# Altium PCB Project2PCB.PcbDoc
Units mm, origin at the board's own origin, x right, y up, seen from the top; angles counter-clockwise.
Board outline 99.44 x 94.87 mm, 2 copper layers (Top Layer, Bottom Layer); 60 components, 61 nets, 240 pads, 2 vias.
Unrouted connection lines stored in the file: 1.
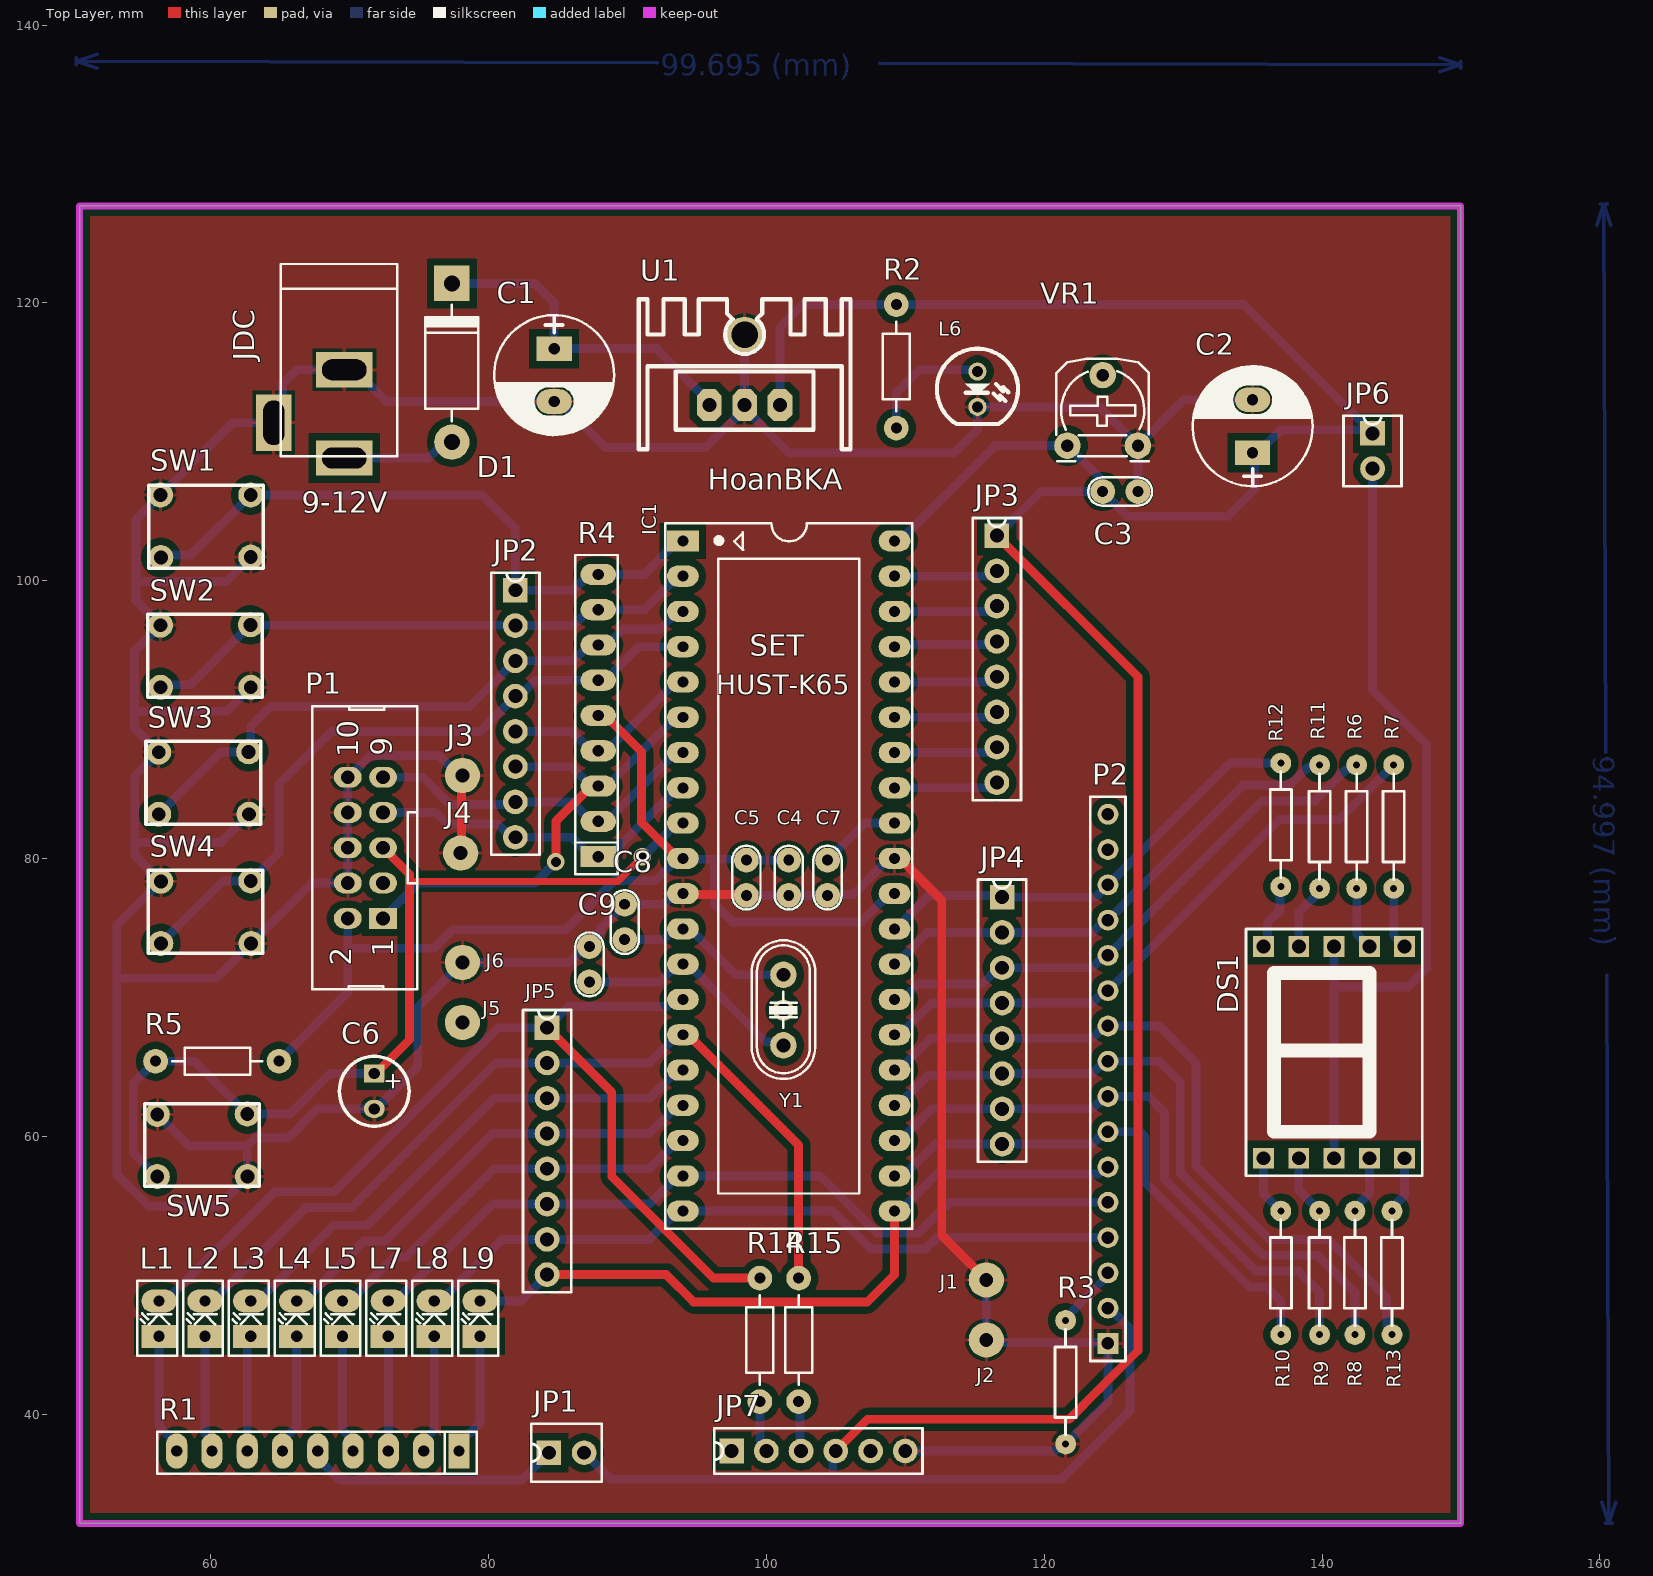
[diagram p0: Top Layer view]
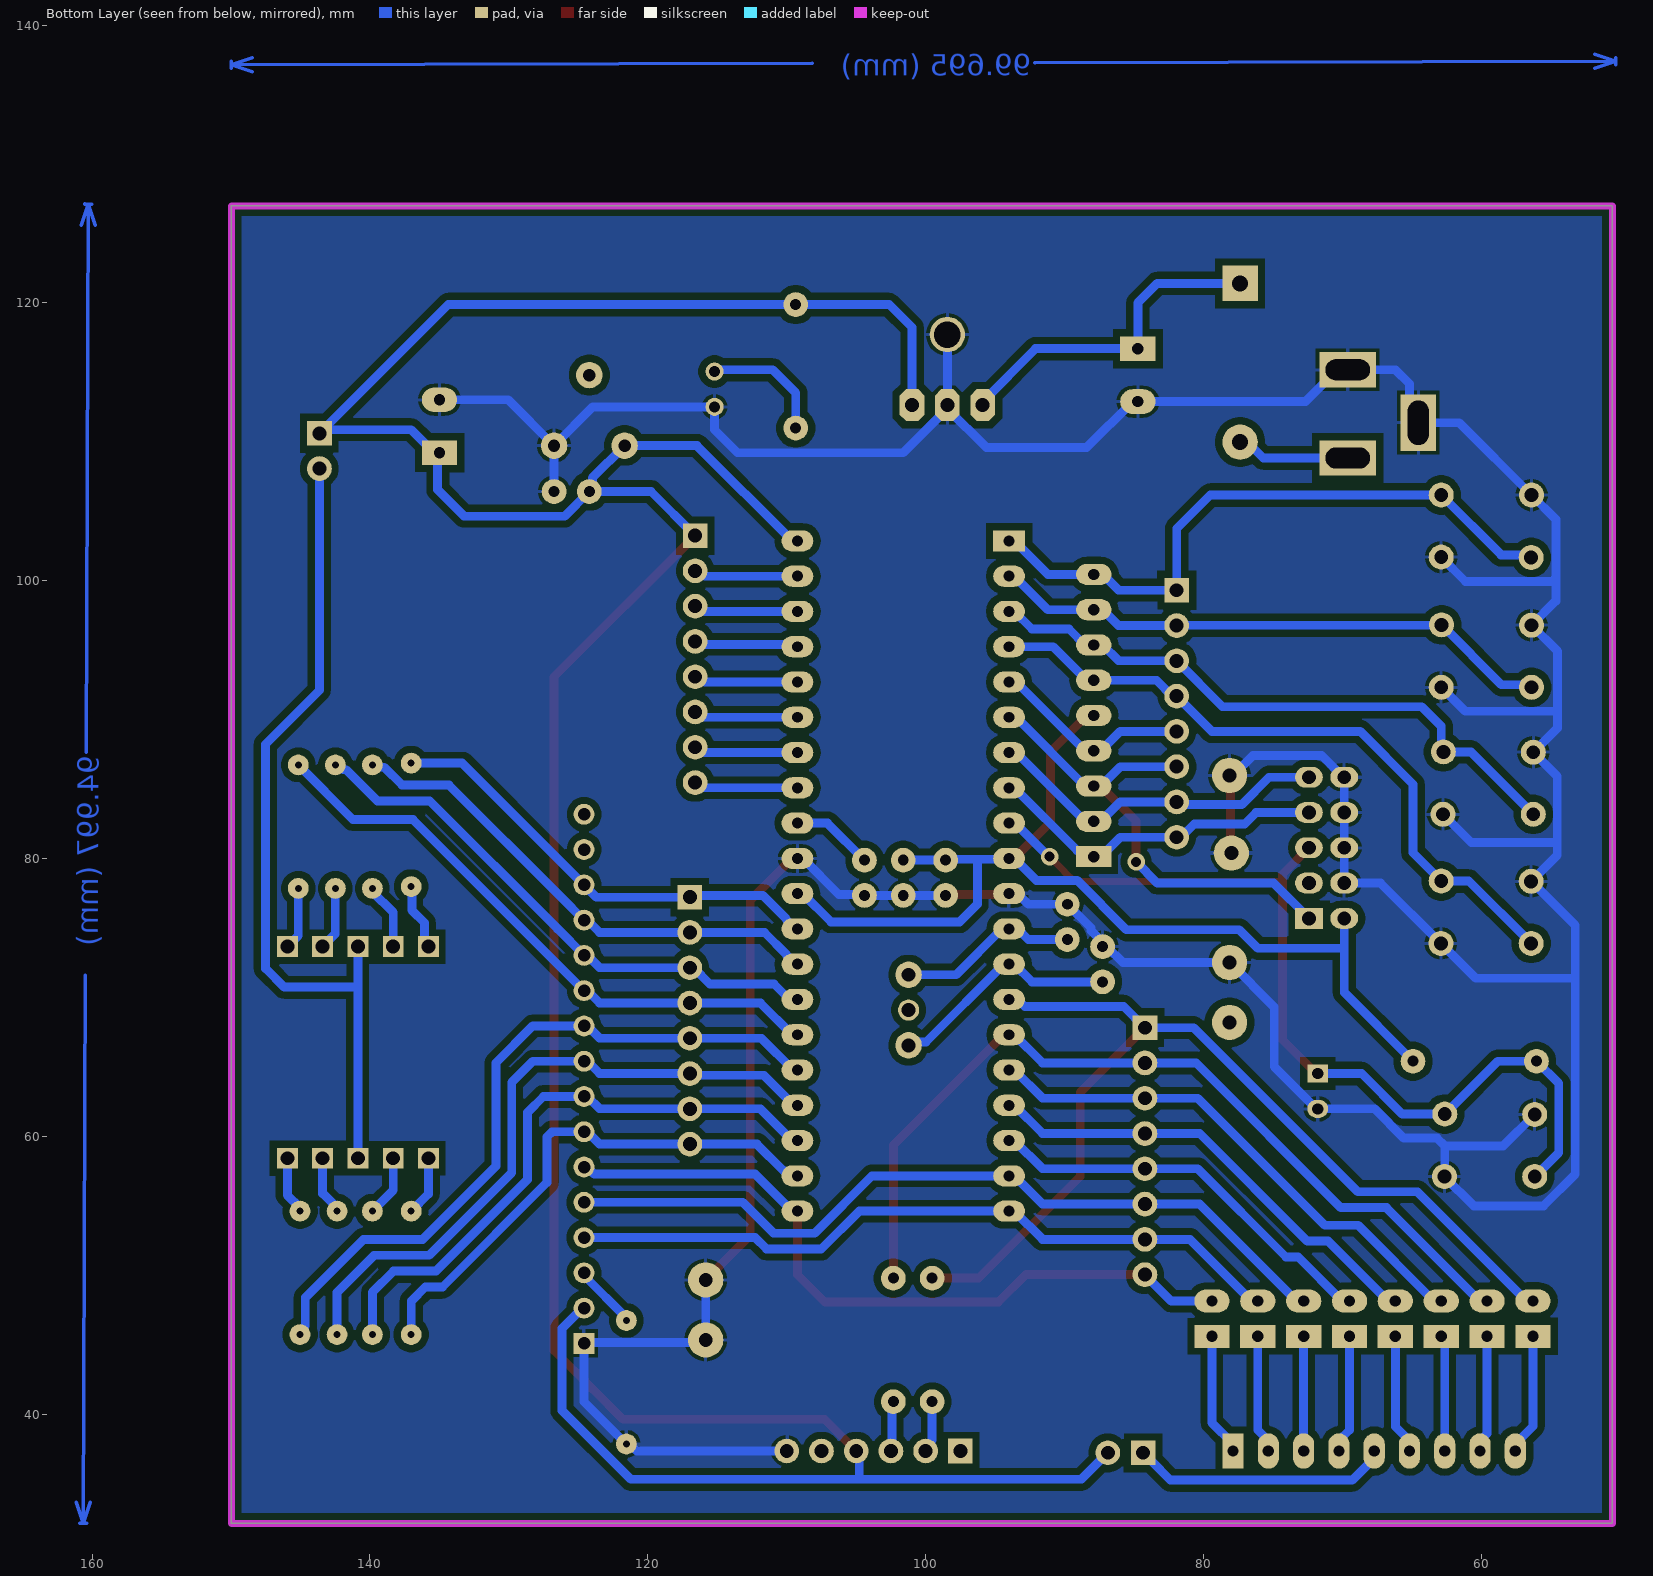
[diagram p1: Bottom Layer view, seen from below]
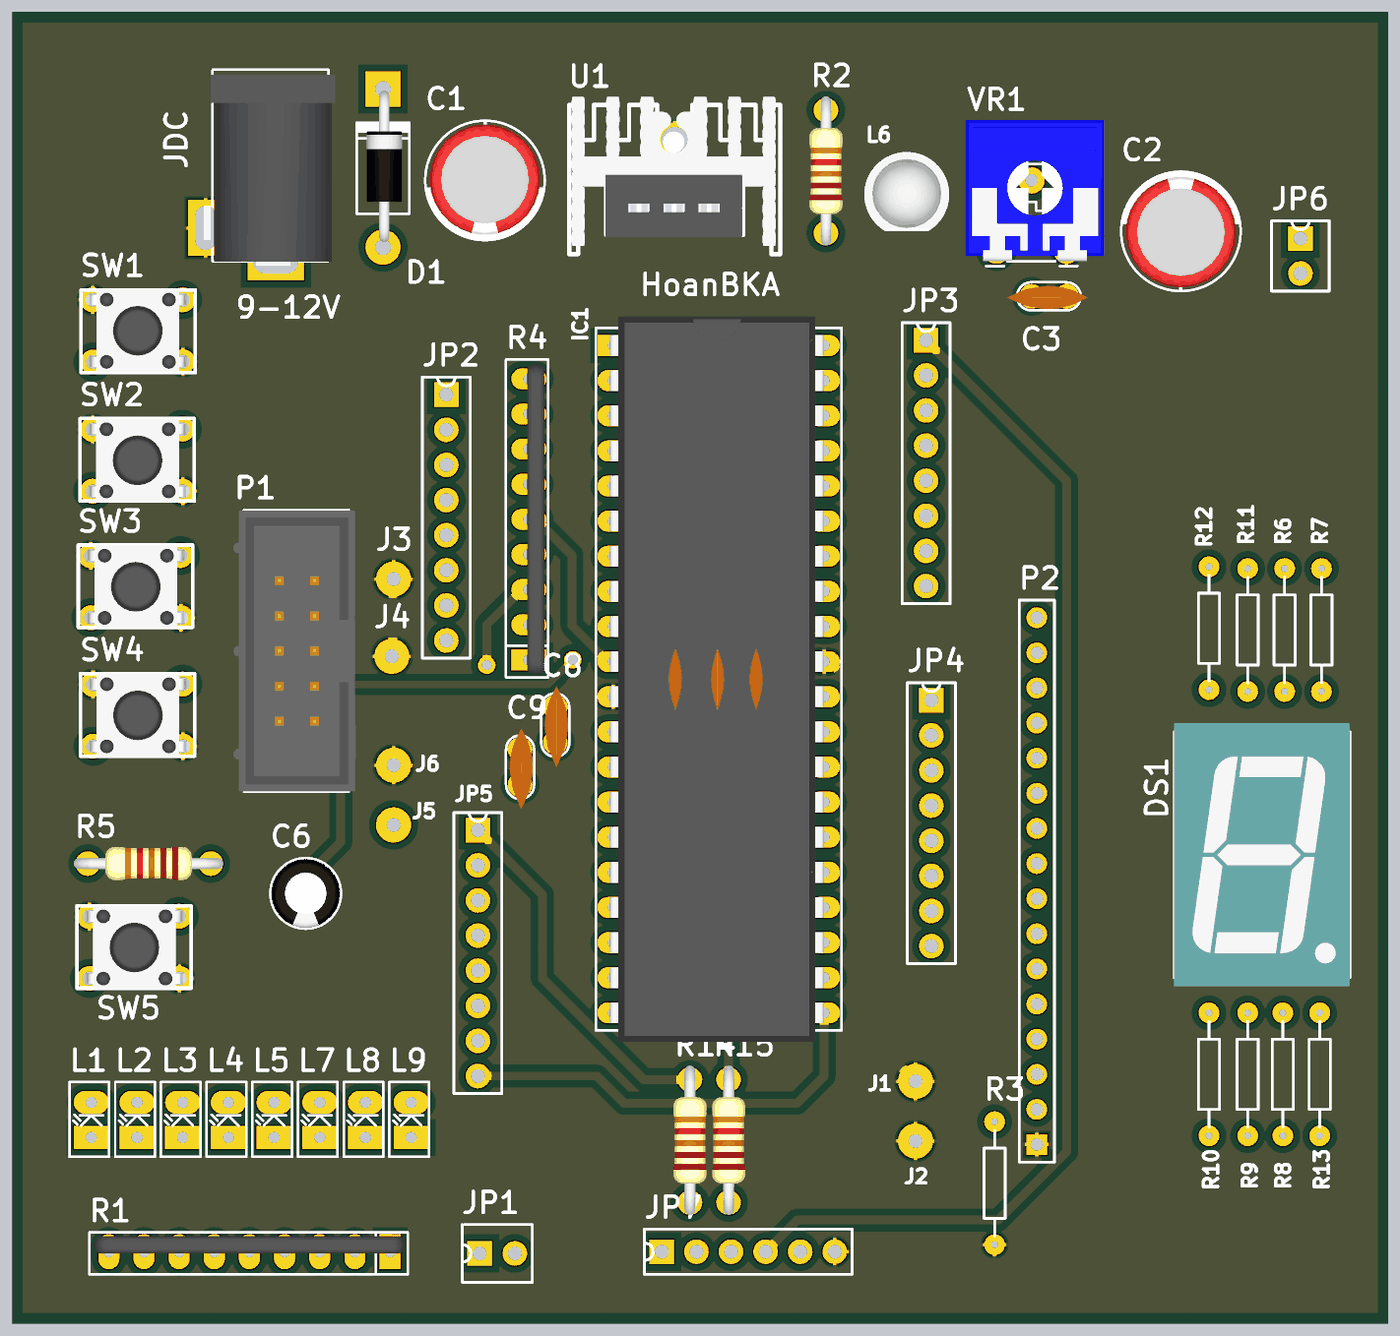
[diagram p2: 3D render of the assembled board from above, using the file's embedded part models]

## Layer stack, top to bottom
Top Solder: solder mask 0.0102, Solder Resist, Dk 3.5
Top Layer: signal copper 0.0356
Dielectric 1: dielectric 0.32, FR-4, Dk 4.8
Bottom Layer: signal copper 0.0356
Bottom Solder: solder mask 0.0102, Solder Resist, Dk 3.5

## Board outline
50.546,32.131 149.987,32.131 149.987,127 50.546,127

## Design rules (kind name [scope] priority, off if disabled: settings)
Clearance [All] p1: gap=0.508 ignorepadtopadclearanceinfootprint=FALSE
PolygonConnect [All] p1: connectstyle=Relief reliefconductorwidth=0.254 reliefentries=4 polygonreliefangle="90 Angle" airgapwidth=0.254
RoutingVias [All] p1: holewidth=0.711 width=1.27 viastyle="Through Hole" minholewidth=0.711 minwidth=1.27 maxholewidth=0.711 maxwidth=1.27
SolderMaskExpansion [All] p1: expansion=0.102 istentingtop=FALSE
Width [All] p1: maxlimit=1.397 minlimit=0.381 preferedwidth=0.381
30 further rules are at their usual default settings.

## Classes and differential pairs
component class Project2SCH: C1 C2 C3 C4 C5 C6 C7 C8 C9 D1 DS1 IC1 J1 J2 J3 J4 J5 J6 JDC JP3 JP6 JP7 L1 L2 L3 L4 L5 L6 L7 L8 L9 P1 P2 R1 R2 R3 R4 R5 R6 R7 R8 R9 R10 R11 R12 R13 R14 R15 SW1 SW2 SW3 SW4 SW5 U1 VR1 Y1

## Components (designator, comment, footprint, x,y, rotation, side; value= is the part's Value field where it differs from the comment)
C1 "1000uF/16V" CP1.5/3.4 84.709,116.713 r270 top
C2 "1000uF/16V" CP1.5/3.4 135.001,109.22 r90 top
C3 "100pF" CN1 126.746,106.426 r180 top
C4 "100nF" CN1 101.6,77.343 r90 top value=100pF
C5 "100nF" CN1 98.552,77.343 r90 top value=100pF
C6 "10uF" C5mm 71.755,63.246 r270 top
C7 "100nF" CN1 104.394,77.343 r90 top value=100pF
C8 "22pF" CN1 89.789,76.708 r270 top value=100pF
C9 "22pF" CN1 87.249,73.66 r270 top value=100pF
D1 "1N4007" D2A 77.343,121.412 r270 top
DS1 "7SEG-A" LED7SEG 140.843,66.04 r0 top
IC1 "ATMEL 16L" DIP40/W0.6 93.98,102.87 r270 top value="Atmega 16L"
J1 "Hole" JP1 115.824,49.657 r90 top
J2 "Hole" JP1 115.824,45.339 r90 top
J3 "Hole" JP1 78.105,85.979 r90 top
J4 "Hole" JP1 77.978,80.391 r90 top
J5 "Hunget" JP1 78.105,68.199 r270 top
J6 "Heatsink Hole" JP1 78.105,72.517 r270 top
JDC "Jac DC" DC-IN 67.056,112.014 r270 top (schematic designator JDC1)
JP1 "JP2" CON2 84.328,37.211 r90 top value="Connector 2"
JP2 "JP8" CON8 81.915,99.314 r0 top value="Connector 8"
JP3 "JP8" CON8 116.586,103.251 r0 top value="Connector 8"
JP4 "JP8" CON8 116.967,77.216 r0 top value="Connector 8"
JP5 "JP8" CON8 84.201,67.818 r0 top value="Connector 8"
JP6 "JP2" CON2 143.637,110.617 r0 top value="Connector 2"
JP7 "JP6" CON6 97.489,37.338 r90 top value="Connector 6"
L1 "LED" LED-V 56.261,45.593 r90 top value="LED 3 ly Single Colour" (schematic designator LED1)
L2 "LED" LED-V 59.563,45.593 r90 top value="LED 3 ly Single Colour" (schematic designator LED2)
L3 "LED" LED-V 62.865,45.593 r90 top value="LED 3 ly Single Colour" (schematic designator LED3)
L4 "LED" LED-V 66.167,45.593 r90 top value="LED 3 ly Single Colour" (schematic designator LED4)
L5 "LED" LED-V 69.469,45.593 r90 top value="LED 3 ly Single Colour" (schematic designator LED5)
L6 "LED_G_5" LED5G 115.189,115.062 r270 top value=Green (schematic designator LED6)
L7 "LED" LED-V 72.771,45.593 r90 top value="LED 3 ly Single Colour" (schematic designator LED7)
L8 "LED" LED-V 76.073,45.593 r90 top value="LED 3 ly Single Colour" (schematic designator LED8)
L9 "LED" LED-V 79.375,45.593 r90 top value="LED 3 ly Single Colour" (schematic designator LED9)
P1 "SPI" IDE_2X5 72.39,75.692 r90 top value="Header 5x2"
P2 "Header 16" HDR1X16 124.587,45.085 r90 top
R1 "1K" RN8 77.851,37.338 r180 top value=10K
R2 "1k" R1/4W 109.347,119.888 r270 top value="R1/4W - 1K"
R3 "1k" R1/6W 121.539,42.291 r90 top value="R1/4W - 1K"
R4 "10K" RN8 87.884,80.137 r90 top
R5 "10k" R1/4W 56.007,65.405 r0 top value="R1/4W - 1K"
R6 "1k" R1/6W 142.494,82.296 r270 top value="R1/4W - 1K"
R7 "1k" R1/6W 145.161,82.296 r270 top value="R1/4W - 1K"
R8 "1k" R1/6W 142.367,50.165 r90 top value="R1/4W - 1K"
R9 "1k" R1/6W 139.827,50.165 r90 top value="R1/4W - 1K"
R10 "1k" R1/6W 137.033,50.165 r90 top value="R1/4W - 1K"
R11 "1k" R1/6W 139.827,82.296 r270 top value="R1/4W - 1K"
R12 "1k" R1/6W 137.033,82.423 r270 top value="R1/4W - 1K"
R13 "1k" R1/6W 145.034,50.165 r90 top value="R1/4W - 1K"
R14 "100R" R1/4W 99.521,49.784 r270 top value="R1/4W - 1K"
R15 "100R" R1/4W 102.315,49.784 r270 top value="R1/4W - 1K"
SW1 "SW" SW-4P-S 62.865,101.702 r180 top value="Button chip 4 pin"
SW2 "SW" SW-4P-S 56.363,96.799 r0 top value="Button chip 4 pin"
SW3 "SW" SW-4P-S 56.236,87.655 r0 top value="Button chip 4 pin"
SW4 "SW" SW-4P-S 56.388,78.359 r0 top value="Button chip 4 pin"
SW5 "SW" SW-4P-S 56.134,61.57 r0 top value="Button chip 4 pin"
U1 "LM7805" QTO-220H3 95.885,112.649 r0 top
VR1 "10K" VR 121.666,109.728 r0 top value="VR 10K"
Y1 "8MHz" XT2 101.219,69.088 r270 top

## Footprints (in the part's own frame and the unit in brackets; to place one, negate y for a bottom-side part, rotate by r counter-clockwise, add the part's x,y. Pads: shape width x height; smd on the part's side, far side on the other; paste and mask are expansions set on the pad)
C5mm [mm]
  rect 1.3x1.5 hole 0.8: 1(-1.27,0)
  oval 1.3x1.5 hole 0.8: 2(1.27,0)
  silkscreen extent -2.51,-2.51 2.51,2.51, body extent -2.5,-2.5 2.49,2.5, height 11.01
CN1 [mil]
  round 70 hole 31: 1(0,0) 2(100,0)
  silkscreen extent -40,-40 141,40, body extent -60,-30 170,37, height 265
CON2 [mil]
  rect 70x70 hole 39.37 unplated: 1(0,0)
  round 70 hole 39.37 unplated: 2(0,-100)
  silkscreen extent -82,-150 82,50
CON6 [mil]
  rect 70x70 hole 39.37 unplated: 1(0,0)
  round 70 hole 39.37 unplated: 2(0,-98.43) 3(0,-196.85) 4(0,-295.28) 5(0,-393.7) 6(0,-492.13)
  silkscreen extent -64,-541 64,49
CON8 [mil]
  rect 70x70 hole 39.37 unplated: 1(0,0)
  round 70 hole 39.37 unplated: 2(0,-100) 3(0,-200) 4(0,-300) 5(0,-400) 6(0,-500) 7(0,-600) 8(0,-700)
  silkscreen extent -68,-750 68,50
CP1.5/3.4 [mil] "Tu hoa 220->470uF,16V, 470uF/16V,25V"
  rect 70x100 hole 32: 1(0,0)
  oval 70x100 hole 32: 2(150,0)
  silkscreen extent -95,-170 245,170, body extent -85,-157 230,157, height 446
D2A [mil] "Diode 2A, W 150mil, L 450mil"
  round 100 hole 45: 1(450,0)
  rect 100x100 hole 45: 2(0,0)
  silkscreen extent 61,-75 391,75, body extent 5,-47 435,54, height 100
DC-IN [mm] "Jac DC input"
  rect 2.54x4.064 hole 1.5 slot 3.2 at 90 deg: 1(3.175,2.54) 2(-3.175,2.54)
  rect 4.064x2.54 hole 1.5 slot 3.2 at 0 deg: 3(0.635,-2.54)
  silkscreen extent -10.8,-2.03 3.05,6.35, body extent -10.42,-2.67 3.4,6.84, height 11.02
DIP40/W0.6 [mil] "40 PIN, W 600mil, Pin to pin 100mil"
  rect 60x90 hole 31: 1(0,0)
  oval 60x90 hole 31: 2(100,0) 3(200,0) 4(300,0) 5(400,0) 6(500,0) 7(600,0) 8(700,0) 9(800,0) 10(900,0) 11(1000,0) 12(1100,0) 13(1200,0) 14(1300,0) 15(1400,0) 16(1500,0) 17(1600,0) 18(1700,0) 19(1800,0) 20(1900,0) 21(1900,600) 22(1800,600) 23(1700,600) 24(1600,600) 25(1500,600) 26(1400,600) 27(1300,600) 28(1200,600) 29(1100,600) 30(1000,600) 31(900,600) 32(800,600) 33(700,600) 34(600,600) 35(500,600) 36(400,600) 37(300,600) 38(200,600) 39(100,600) 40(0,600)
  silkscreen extent -50,-50 1950,650, body extent -82,-10 1982,600, height 224
HDR1X16 [mm] "Connector; Header; 16 Position"
  rect 1.5x1.5 hole 0.9: 1(0,0)
  round 1.5 hole 0.9: 2(2.54,0) 3(5.08,0) 4(7.62,0) 5(10.16,0) 6(12.7,0) 7(15.24,0) 8(17.78,0) 9(20.32,0) 10(22.86,0) 11(25.4,0) 12(27.94,0) 13(30.48,0) 14(33.02,0) 15(35.56,0) 16(38.1,0)
  silkscreen extent -1.27,-1.27 39.37,1.27, body extent -1.27,-1.27 39.37,1.27, height 7
IDE_2X5 [mm] "Header 10x2,20 pin, connecter"
  rect 1.5x2 hole 1: 1(0,0)
  oval 1.5x2 hole 1: 2(0,2.54) 3(2.54,0) 4(2.54,2.54) 5(5.08,0) 6(5.08,2.54) 7(7.62,0) 8(7.62,2.54) 9(10.16,0) 10(10.16,2.54)
  silkscreen extent -5.1,-2.47 15.29,5.11, body extent -5.07,-2.98 15.23,5.87, height 9.17
JP1 [mm]
  round 2.54 hole 1: 1(0,0)
LED5G [mm] "LED, GREEN, 2 LEAD, 5mm"
  round 1.3 hole 0.8: 1(0,0) 2(2.54,0)
  silkscreen extent -1.65,-2.92 3.77,2.92, body extent -1.71,-3.01 3.71,3.01, height 12.31
LED7SEG [mm] "LED7SEG"
  round 1.524 on Top Overlay: 0(4.724,-5.334)
  rect 1.5x1.5 hole 1: 1(-5.055,-7.62) 2(-2.515,-7.62) 3(0.025,-7.62) 4(2.565,-7.62) 5(5.105,-7.62) 6(5.105,7.62) 7(2.565,7.62) 8(0.025,7.62) 9(-2.515,7.62) 10(-5.055,7.62)
  silkscreen extent -6.32,-8.89 6.38,8.89, body extent -6.35,-9.52 6.35,9.53, height 8.03
LED-V [mil] "LED 2 PIN, Rectang Only colour"
  rect 65x100 hole 32: 1(0,0)
  oval 65x100 hole 32: 2(100,0)
  silkscreen extent -55,-51 158,62
QTO-220H3 [mil] "TO-220 1-2-3"
  oct 70x90 hole 40: 1(0,0) 2(100,0) 3(200,0)
  round 100 hole 75: 2(100,200)
  silkscreen extent -200,-125 400,300, body extent -194,-102 388,323, height 984
R1/4W [mil] "R 1/4W, 2 Pin, 350mil"
  round 70 hole 31: 1(0,0) 2(350,0)
  silkscreen extent 48,-38 302,38, body extent -40,-47 386,47, height 111
R1/6W [mm]
  round 1.5 hole 0.5: 1(-4.445,0) 2(4.445,0)
  silkscreen extent -3.81,-0.76 3.81,0.76
RN8 [mil] "R SIP8, 9 Pin"
  rect 60x100 hole 32: 1(0,0)
  oval 60x100 hole 32: 2(100,0) 3(200,0) 4(300,0) 5(400,0) 6(500,0) 7(600,0) 8(700,0) 9(800,0)
  silkscreen extent -50,-55 855,65, body extent -43,-44 843,5, height 259
SW-4P-S [mm]
  round 1.8 hole 1: 1(0,0) 2(0,-4.47) 3(6.502,-4.47) 4(6.477,0.025)
  silkscreen extent -0.91,-5.18 7.34,0.79, body extent -0.86,-5.23 7.35,0.76, height 9.52
VR [mil] "Resistor Variable"
  round 75 hole 35: 1(0,0) 2(100,200) 3(200,0)
  silkscreen extent -31,-44 231,246, body extent -87,-30 307,372, height 165
XT2 [mm] "Footpin for Crystal 2 pin"
  round 1.524 hole 1: 0(0,0)
  round 1.905 hole 1: 1(-2.54,0) 2(2.54,0)
  silkscreen extent -5.03,-2.29 4.96,2.29, body extent -5.93,-2.36 5.42,2.29, height 3.5

## Part data
C1 C2: library part CP4, "Cap 1000uF/16V - 220uF/50V", Description 1="2200uF-3300uF/6,3V - 1000uF-2200uF/10V", Description 2="1000uF/16V - 470uF => 1000uF/25V - 100uF/100V", Description 3=330uF>470uF/35V_220uF>470uF/50V_10uF>22uF/250V, Description 4="220uF => 330uF/63V - 10uF =>33uF/160 - 200V", Description 5="4,7uF>10uF/250V_3,3uF>10uF/400V - 2,2uF>4,7uF/450V"
C3 C4 C5 C7 C8 C9: library part CN1, "Cap np  1pF - 472pF"
C6: library part "Cap Pol 5mm", "Polarized Capacitor (Axial)", LatestRevisionDate=17-Jul-2002, LatestRevisionNote="Re-released for DXP Platform.", PackageReference=POLAR0.8, Published=8-Jun-2000, Publisher="Altium Limited"
D1: library part D1A, "Diode 1A"
DS1: library part LED7SEG-A, "14.2 mm General Purpose Blue 7-Segment Display: CA, RH DP, Gray Surface", Colour=Blue, PackageDocument=24-Sep-2002, ComponentLink1Description="Manufacturer Link", ComponentLink1URL=http://www.agilent.com/, DatasheetDocument=24-Sep-2002, LatestRevisionDate=17-Dec-2003, LatestRevisionNote="Schematic revised, PCB Footprint replaced.", MinimumIntensity="2020 ucd", Note="IF = 10 mA", PackageReference=H, Published=8-Jun-2000, Publisher="Altium Limited"
IC1: library part Atmega16L, "8-Bit AVR Microcontroller with 16K Bytes of In-System Programmable Flash Memory"
J1 J2 J3 J4 J5 J6: library part JP1, "JP1"
JDC: library part DCIN, "Jac DC input"
JP1 JP6: library part Con2, "Connector 2"
JP2 JP3 JP4 JP5: library part Con8, "Connector 8"
JP7: library part Con6, "Connector 6"
L1 L2 L3 L4 L5 L7 L8 L9: "LED Single colour Green and Red"
L6: library part LED_GREEN_5MM, "LED Green 5mm", ComponentLink1Description=Datasheet, ComponentLink1URL="D:\Dropbox\Datasheets\Opto and Illumination\LEDs\SMD LED.pdf", Unit Price=0.0476
P1: library part "IDE 5x2", "Header 5x2"
P2: "Header, 16-Pin", LatestRevisionDate=17-Jul-2002, LatestRevisionNote="Re-released for DXP Platform.", Publisher="Altium Limited"
R1 R4: library part RKC8LD, "Resistor Pack 4x2"
R2 R5 R14 R15: library part R1/4W, "Resistor 1/4W"
R3 R6 R7 R8 R9 R10 R11 R12 R13: library part Res, "Resistor 1/4W"
SW1 SW2 SW3 SW4 SW5: library part SW4, "Switch button 4 pin"
U1: "TO-220", Text Field1=70, Text Field2=30
VR1: library part VR1, "Var Resistor"
Y1: library part Crystal, "Crystal Oscillator", LatestRevisionDate=17-Jul-2002, LatestRevisionNote="Re-released for DXP Platform.", PackageReference=R38, Published=8-Jun-2000, Publisher="Altium Limited"

## Via types
v1: diameter 1.27, hole 0.711, Top Layer to Bottom Layer, 2 vias

## Nets (pads, with @x,y where several pads share a name; then routed paths per layer and width w, separated by ;. In a path a pad name is that pad's centre, name@x,y a point inside that pad or via, vN(x,y) a via of type N, cw(c..) or ccw(c..) an arc to the next point about the centre after c; other vN are vias at no path point)
AVR_RX: IC1.14 JP5.1 L1.2 R14.1 | length 73.1
  Top Layer w0.635: JP5.1 88.857,63.162 88.857,57.107 96.18,49.784 R14.1
  Bottom Layer w0.635: L1.2 56.706,48.133 64.579,56.007 68.876,56.007 80.687,67.818 JP5.1 85.725,69.342 92.85,69.342 93.358,69.85 IC1.14
AVR_TX: IC1.15 JP5.2 L2.2 R15.1 | length 63.6
  Top Layer w0.635: IC1.15 94.361,67.31 102.315,59.356 R15.1
  Bottom Layer w0.635: L2.2 60.086,48.133 66.817,54.864 70.104,54.864 80.518,65.278 JP5.2 91.567,65.278 93.599,67.31 IC1.15
GND: C1.2 C2.2 C3.1 C4.1 C5.1 C6.2 C7.1 C8.1 C9.1 IC1.11 IC1.31 J1.1 J2.1 J3.1 J4.1 J6.1 JDC.2 JDC.3 JP7.6 L6.2 P1.4 P1.6 P1.8 P1.10 P2.1 R3.1 SW1.1 SW1.3 SW2.1 SW2.3 SW3.1 SW3.3 SW4.1 SW4.3 SW5.1 SW5.3 U1.2 VR1.3 | length 371.9
  Top Layer w0.635: J4.1 78.041,80.454 78.041,85.915 J3.1 ; IC1.11 94.043,77.406 98.489,77.406 C5.1 ; IC1.31 109.601,80.01 112.615,76.996 112.615,52.866 J1.1
  Bottom Layer w0.635: SW5.1 58.395,59.309 62.611,59.309 ; SW3.3 60.706,81.153 54.51,81.153 ; SW2.3 61.14,90.604 54.684,90.604 54.483,90.805 ; SW1.1 61.114,99.951 54.862,99.951 54.61,100.203 ; J3.1 77.859,85.979 76.41,87.428 71.487,87.428 69.912,85.852 P1.10 P1.8 P1.6 P1.4 67.234,78.232 SW4.3 60.376,71.374 53.213,71.374 ; IC1.11 93.358,77.47 92.596,76.708 C8.1 88.075,74.993 88.075,74.795 87.249,73.969 C9.1 86.94,73.66 85.797,72.517 J6.1 74.888,69.3 74.888,65.009 71.855,61.976 67.661,61.976 65.555,59.87 63.172,59.87 62.611,59.309 ; U1.2@98.425,117.729 98.425,112.649 U1.2@98.425,112.395 ; C5.1 C4.1 C7.1 104.457,77.406 106.236,77.406 108.839,80.01 IC1.31 ; JP7.6 120.797,37.338 121.305,37.846 R3.1 124.587,40.894 P2.1 124.512,45.16 116.003,45.16 J2.1 J1.1 ; C3.1 VR1.3 ; C2.2 130.048,113.03 VR1.3 ; 53.213,71.374 53.213,75.184 SW4.1 54.51,80.237 54.51,81.153 ; 53.213,71.374 53.213,57.277 55.499,54.991 60.528,54.991 SW5.3 62.611,57.125 62.611,59.309 ; 54.483,90.805 54.483,94.92 SW2.1 54.61,98.552 54.61,100.203 ; 54.483,90.805 54.483,89.408 SW3.1 54.51,85.93 54.51,81.153 ; 54.61,100.203 54.61,104.419 SW1.3 61.57,111.379 JDC.3 65.151,112.014 65.151,114.173 66.167,115.189 JDC.2 70.358,115.189 72.644,112.903 C1.2 85.09,112.903 88.392,109.601 95.631,109.601 U1.2@98.425,112.395 ; U1.2@98.425,112.395 101.6,109.22 113.538,109.22 115.189,110.871 L6.2 123.952,112.522 VR1.3
MISO: IC1.7 JP2.7 P1.9 R4.2 | length 25.1
  Bottom Layer w0.635: P1.9 75.269,85.852 77.237,83.883 81.724,83.883 JP2.7 85.979,84.074 87.376,82.677 R4.2 88.519,82.677 93.472,87.63 IC1.7
MOSI: IC1.6 JP2.6 P1.1 R4.3 | length 35.8
  Top Layer w0.635: v1(84.836,79.756) 84.836,82.677 87.376,85.217 R4.3
  Bottom Layer w0.635: P1.1 74.93,78.232 83.312,78.232 v1(84.836,79.756) ; JP2.6 85.979,86.614 87.376,85.217 R4.3 88.519,85.217 93.472,90.17 IC1.6
NetC1_1: C1.1 D1.2 U1.1 | length 24.3
  Bottom Layer w0.635: D1.2 83.312,121.412 84.709,120.015 C1.1 92.075,116.713 95.885,112.903 U1.1
NetC7_2: C7.2 IC1.32 | length 5.9
  Bottom Layer w0.635: C7.2 107.061,82.55 IC1.32
NetC8_2: C8.2 IC1.12 Y1.1 | length 13.1
  Bottom Layer w0.635: C8.2 92.596,74.168 93.358,74.93 IC1.12 94.488,74.93 97.79,71.628 Y1.1
NetC9_2: C9.2 IC1.13 Y1.2 | length 16.9
  Bottom Layer w0.635: C9.2 92.329,71.12 93.599,72.39 IC1.13 94.361,72.39 99.96,66.791 100.976,66.791 Y1.2
NetD1_1: D1.1 JDC.1 | length 8.2
  Bottom Layer w0.635: JDC.1 75.685,108.839 76.828,109.982 D1.1
NetDS1_1: DS1.1 R10.2 | length 4.3
  Bottom Layer w0.635: DS1.1 135.788,55.855 R10.2
NetDS1_2: DS1.2 R9.2 | length 4.4
  Bottom Layer w0.635: DS1.2 138.328,56.109 R9.2
NetDS1_3: DS1.3 DS1.8 JP6.2 | length 60.1
  Bottom Layer w0.635: DS1.3 140.868,70.739 ; DS1.8 140.868,70.739 ; JP6.2 143.637,92.111 147.524,88.224 147.524,72.086 146.177,70.739 140.868,70.739
NetDS1_4: DS1.4 R8.2 | length 4.2
  Bottom Layer w0.635: R8.2 142.367,54.844 143.408,55.885 DS1.4
NetDS1_5: DS1.5 R13.2 | length 4.2
  Bottom Layer w0.635: R13.2 145.034,54.844 145.948,55.758 DS1.5
NetDS1_6: DS1.6 R7.2 | length 4.5
  Bottom Layer w0.635: R7.2 145.161,74.447 DS1.6
NetDS1_7: DS1.7 R6.2 | length 4.6
  Bottom Layer w0.635: R6.2 142.494,74.574 DS1.7
NetDS1_9: DS1.9 R11.2 | length 4.8
  Bottom Layer w0.635: DS1.9 138.328,76.118 139.827,77.617 R11.2
NetDS1_10: DS1.10 R12.2 | length 4.8
  Bottom Layer w0.635: DS1.10 136.071,73.943 136.071,75.363 136.984,76.275 136.984,77.929 R12.2
NetJP1_1: JP1.1 R1.5 | length 18.6
  Bottom Layer w0.635: R1.5 67.691,36.83 69.278,35.242 82.359,35.242 83.756,36.639 JP1.1
NetJP7_2: JP7.2 R14.2 | length 3.7
  Bottom Layer w0.635: R14.2 99.521,38.115 99.989,37.647 JP7.2
NetJP7_3: JP7.3 R15.2 | length 3.6
  Bottom Layer w0.635: R15.2 102.402,40.807 102.402,37.425 JP7.3
NetLED1_1: L1.1 R1.9 | length 8.8
  Bottom Layer w0.635: L1.1 56.261,39.116 57.531,37.846 R1.9
NetLED2_1: L2.1 R1.8 | length 8.5
  Bottom Layer w0.635: L2.1 59.563,38.595 60.071,38.087 R1.8
NetLED3_1: L3.1 R1.7 | length 8.4
  Bottom Layer w0.635: R1.7 62.611,45.339 L3.1
NetLED4_1: L4.1 R1.6 | length 8.7
  Bottom Layer w0.635: R1.6 65.151,38.087 66.167,39.103 L4.1
NetLED5_1: L5.1 R1.4 | length 8.6
  Bottom Layer w0.635: L5.1 69.469,38.849 70.231,38.087 R1.4
NetLED6_1: L6.1 R2.2 | length 9.1
  Bottom Layer w0.635: R2.2 109.347,113.538 110.998,115.189 115.062,115.189 L6.1
NetLED7_1: L7.1 R1.3 | length 8.3
  Bottom Layer w0.635: R1.3 L7.1
NetLED8_1: L8.1 R1.2 | length 8.6
  Bottom Layer w0.635: R1.2 75.311,38.087 76.073,38.849 L8.1
NetLED9_1: L9.1 R1.1 | length 8.9
  Bottom Layer w0.635: R1.1 77.851,37.846 79.375,39.37 L9.1
NetP2_3: P2.3 R3.2 | length 4.7
  Bottom Layer w0.635: R3.2 121.539,46.927 124.587,49.975 P2.3
PA0: C2.1 C3.2 C4.2 C5.2 IC1.10 IC1.30 IC1.40 JP1.2 JP3.1 JP6.1 JP7.4 P1.2 P2.2 R2.1 R4.5 R5.2 U1.3 VR1.1 | length 323.3
  Top Layer w0.635: R4.5 88.392,90.297 90.996,87.693 90.996,82.613 93.599,80.01 IC1.10 ; JP7.4 107.275,39.624 121.793,39.624 123.978,41.809 126.746,44.577 126.746,93.091 JP3.1
  Bottom Layer w0.635: R5.2 69.85,70.358 69.85,73.533 ; P1.2 69.85,73.533 ; JP1.2 88.773,35.306 104.775,35.306 ; U1.3 100.965,118.237 102.616,119.888 R2.1 134.366,119.888 JP6.1@143.383,110.871 ; C4.2 C5.2 98.489,79.947 96.266,79.947 ; JP7.4 104.775,37.124 104.775,35.306 ; IC1.30 108.839,77.47 106.807,75.438 97.536,75.438 96.266,76.708 96.266,79.947 ; IC1.40 109.601,102.87 116.459,109.728 VR1.1 123.987,107.407 123.987,106.645 C3.2 ; JP3.1 119.761,106.426 C3.2 ; P2.2 124.714,47.625 126.163,46.177 126.163,40.241 121.227,35.306 104.775,35.306 ; JP6.1 JP6.1@143.383,110.871 ; 69.85,73.533 76.073,73.533 77.416,74.876 85.533,74.876 89.079,78.422 92.011,78.422 93.599,80.01 IC1.10 94.043,79.947 96.266,79.947 ; C3.2 125.984,104.648 133.223,104.648 135.128,106.553 135.128,109.093 C2.1 135.382,109.22 137.033,110.871 JP6.1@143.383,110.871
PA1: IC1.39 JP3.2 | length 7.5
  Bottom Layer w0.635: IC1.39 115.896,100.33 116.277,100.711 JP3.2
PA2: IC1.38 JP3.3 | length 7.5
  Bottom Layer w0.635: IC1.38 115.896,97.79 116.277,98.171 JP3.3
PA3: IC1.37 JP3.4 | length 7.5
  Bottom Layer w0.635: IC1.37 109.39,95.42 116.375,95.42 JP3.4
PA4: IC1.36 JP3.5 | length 7.5
  Bottom Layer w0.635: IC1.36 115.896,92.71 116.277,93.091 JP3.5
PA5: IC1.35 JP3.6 | length 7.5
  Bottom Layer w0.635: IC1.35 115.896,90.17 116.277,90.551 JP3.6
PA6: IC1.34 JP3.7 | length 7.5
  Bottom Layer w0.635: IC1.34 115.896,87.63 116.277,88.011 JP3.7
PA7: IC1.33 JP3.8 | length 7.5
  Bottom Layer w0.635: IC1.33 115.896,85.09 116.277,85.471 JP3.8
PB0: IC1.1 JP2.1 R4.9 SW1.2 SW1.4 | length 46.4
  Bottom Layer w0.635: SW1.4 56.575,101.863 58.556,101.863 SW1.2 79.502,106.172 81.915,103.759 JP2.1 86.094,99.314 87.237,100.457 R4.9 91.186,100.457 93.599,102.87 IC1.1
PB1: IC1.2 JP2.2 R4.8 SW2.2 SW2.4 | length 41
  Bottom Layer w0.635: SW2.2 56.549,92.516 58.53,92.516 SW2.4 62.865,96.799 81.89,96.799 JP2.2 86.094,96.774 87.237,97.917 R4.8 91.186,97.917 93.599,100.33 IC1.2
PB2: IC1.3 JP2.3 R4.7 SW3.2 SW3.4 | length 44.8
  Bottom Layer w0.635: SW3.2 60.731,87.681 SW3.4 62.863,87.831 62.863,89.533 64.262,90.932 78.613,90.932 JP2.3 86.094,94.234 87.237,95.377 88.524,95.377 89.67,96.523 92.332,96.523 93.599,97.79 IC1.3
PB3: IC1.4 JP2.4 R4.6 SW4.2 SW4.4 | length 49.3
  Bottom Layer w0.635: SW4.2 60.884,78.384 SW4.4 64.897,80.416 64.897,85.344 68.707,89.154 79.375,89.154 JP2.4 82.224,91.694 83.367,92.837 R4.6 88.392,92.837 90.805,95.25 IC1.4
PB4: IC1.5 JP2.5 R4.4 | length 14.7
  Bottom Layer w0.635: JP2.5 85.979,89.154 87.376,87.757 R4.4 88.519,87.757 93.472,92.71 IC1.5
PC0: IC1.22 JP4.8 P2.7 R10.1 | length 38.5
  Bottom Layer w0.635: IC1.22 109.842,57.15 110.286,57.594 110.299,57.594 112.141,59.436 JP4.8 123.464,59.436 124.353,60.325 126.882,60.325 127.254,59.953 127.254,56.677 134.782,49.149 136.017,49.149 137.033,48.133 R10.1
PC1: IC1.23 JP4.7 P2.8 R9.1 | length 43.4
  Bottom Layer w0.635: IC1.23 109.601,59.69 111.887,61.976 123.464,61.976 P2.8@124.353,62.865 ; P2.8 127.508,62.865 128.651,61.722 128.651,56.896 135.255,50.292 138.303,50.292 139.827,48.768 R9.1
PC2: IC1.24 JP4.6 P2.9 R8.1 | length 48.2
  Bottom Layer w0.635: IC1.24 109.474,62.23 111.633,64.389 116.84,64.389 JP4.6 123.464,64.516 124.353,65.405 P2.9 128.27,65.405 129.794,63.881 129.794,57.369 135.728,51.435 139.7,51.435 142.367,48.768 R8.1
PC3: IC1.25 JP4.5 P2.10 R13.1 | length 52
  Bottom Layer w0.635: IC1.25 109.528,64.77 111.814,67.056 123.464,67.056 124.353,67.945 P2.10 128.27,67.945 130.937,65.278 130.937,57.843 136.202,52.578 140.462,52.578 144.656,48.384 144.656,46.332 145.034,45.954 R13.1
PC4: IC1.26 JP4.4 P2.11 R7.1 | length 44
  Bottom Layer w0.635: IC1.26 109.601,67.31 111.887,69.596 JP4.4 123.464,69.596 124.353,70.485 P2.11 136.906,82.804 141.224,82.804 R7.1
PC5: IC1.27 JP4.3 P2.12 R6.1 | length 40
  Bottom Layer w0.635: IC1.27 109.788,69.85 110.907,70.969 115.53,70.969 116.697,72.136 123.464,72.136 P2.12@124.353,73.025 ; P2.12 126.492,74.93 135.712,84.149 139.464,84.149 141.706,86.392 141.911,86.392 142.26,86.741 R6.1
PC6: IC1.28 JP4.2 P2.13 R11.1 | length 36.3
  Bottom Layer w0.635: IC1.28 109.36,72.39 110.031,73.06 110.031,73.115 111.592,74.676 123.464,74.676 P2.13@124.353,75.565 ; P2.13 126.238,77.216 134.315,85.292 137.686,85.292 138.969,86.575 139.661,86.575 R11.1
PC7: IC1.29 JP4.1 P2.14 R12.1 | length 32.9
  Bottom Layer w0.635: IC1.29 109.36,74.93 110.031,75.6 110.031,75.655 111.719,77.343 116.84,77.343 JP4.1 123.698,77.216 133.35,86.868 R12.1
PD2: IC1.16 JP5.3 L3.2 | length 38
  Bottom Layer w0.635: L3.2 63.388,48.133 68.849,53.594 71.247,53.594 80.391,62.738 JP5.3 91.567,62.738 93.599,64.77 IC1.16
PD3: IC1.17 JP5.4 L4.2 | length 33.7
  Bottom Layer w0.635: L4.2 66.69,48.133 71.008,52.451 72.517,52.451 80.264,60.198 JP5.4 91.567,60.198 93.599,62.23 IC1.17
PD4: IC1.18 JP5.5 L5.2 | length 29.3
  Bottom Layer w0.635: L5.2 69.992,48.133 73.167,51.308 74.041,51.308 80.391,57.658 JP5.5 91.567,57.658 93.599,59.69 IC1.18
PD5: IC1.19 JP5.6 L7.2 P2.5 | length 58.2
  Bottom Layer w0.635: L7.2 73.279,48.133 80.264,55.118 JP5.6 91.567,55.118 93.599,57.15 IC1.19 103.851,57.15 107.979,53.023 110.934,53.023 113.157,55.245 P2.5
PD6: IC1.20 JP5.7 L8.2 P2.4 | length 52.7
  Bottom Layer w0.635: L8.2 76.517,48.133 80.962,52.578 91.567,52.578 93.599,54.61 IC1.20 104.775,54.61 107.505,51.88 111.442,51.88 112.268,52.705 P2.4
PD7: IC1.21 JP5.8 L9.2 P2.6 | length 53.5
  Top Layer w0.635: JP5.8 92.783,50.038 94.752,48.069 107.251,48.069 109.22,50.038 IC1.21
  Bottom Layer w0.635: L9.2 82.296,48.133 JP5.8 ; IC1.21 109.601,54.61 112.268,57.277 123.845,57.277 124.353,57.785 P2.6
RESET: C6.1 IC1.9 P1.5 R5.1 SW5.2 SW5.4 | length 67.9
  Top Layer w0.508: 74.216,78.359 89.305,78.359 89.98,79.033 89.98,79.057 v1(91.059,80.137)
  Top Layer w0.635: C6.1 71.855,64.516 74.295,66.956 74.295,78.867 73.073,80.089 73.073,80.105 72.406,80.772 P1.5
  Bottom Layer w0.635: SW5.2 54.409,58.825 54.409,63.807 R5.1 58.801,65.405 SW5.4 65.664,61.595 68.585,64.516 C6.1 ; v1(91.059,80.137) 91.123,80.137 93.535,82.55 IC1.9
SCK: IC1.8 JP2.8 P1.7 R4.1 | length 25
  Bottom Layer w0.635: P1.7 76.192,83.312 77.018,82.486 80.653,82.486 81.606,81.534 JP2.8 85.979,81.534 87.376,80.137 R4.1 88.328,80.581 89.09,80.581 93.599,85.09 IC1.8
pads on no net: DS1.0 J5.1 JP7.1 JP7.5 P1.3 P2.15 P2.16 VR1.2 Y1.0
copper on no net: | length 177.5
  Bottom Layer w0.254: 50.291,137.16 50.293,137.668 ; 51.815,136.902 50.292,137.414 ; 51.817,137.918 50.292,137.414 ; 92.116,137.307 50.292,137.414 ; 108.163,137.267 149.987,137.16 ; 148.462,136.656 149.987,137.16 ; 148.464,137.672 149.987,137.16 ; 149.986,136.906 149.988,137.414 ; 159.772,125.601 160.274,127.127 ; 160.02,127.126 160.528,127.128 ; 160.141,33.653 160.655,32.131 ; 160.401,32.13 160.909,32.132 ; 160.432,87.653 160.274,127.127 ; 160.497,71.605 160.655,32.131 ; 160.788,125.605 160.274,127.127 ; 161.157,33.657 160.655,32.131

## Polygon pours and split planes (outlines as drawn)
GND on Bottom Layer "GND_L02_P000" (solid, pour order 0): 50.292,127 149.86,127 149.86,32.385 149.606,32.131 50.292,32.131
GND on Top Layer "GND_L01_P001" (solid, pour order 1): 50.546,127.381 149.733,127.381 149.86,127.254 149.86,32.131 51.181,32.131 50.546,32.766

## Keep-outs
Keep-Out Layer:
  lines w0.381: 50.546,32.131 50.546,127 149.987,127 149.987,32.131 50.546,32.131
  lines w0.508: 50.546,32.131 50.546,127 149.987,127 149.987,32.131 50.546,32.131

## Other copper
Bottom Layer:
  text "99.695 (mm)" at 92.367,136.393 h1.52 r359.85
  text "94.997 (mm)" at 159.519,87.395 h1.52 r270.23

## Silkscreen, mask and mechanical layers (free items; w line width, h text height)
Top Overlay:
  text "HoanBKA" at 95.758,106.553 h1.52
  text "9-12V" at 66.548,104.902 h1.52
  text "SET" at 98.806,94.615 h1.52
  text "HUST-K65" at 96.393,91.821 h1.4

## Text inside footprints (layer, text, board x,y; h text height)
C6: Top Overlay "+" at 72.593,64.643 h1.2 r270
P1: Top Overlay "1" at 73.14,72.917 h1.52 r90; Top Overlay "2" at 70.104,72.263 h1.52 r90; Top Overlay "9" at 73,87.401 h1.52 r90; Top Overlay "10" at 70.587,87.274 h1.52 r90